# Altium PCB Solar tracker pcb.PcbDoc
Units mm, origin at the board's own origin, x right, y up, seen from the top; angles counter-clockwise.
Board outline 139.83 x 89.41 mm, 2 copper layers (Top Layer, Bottom Layer); 53 components, 31 nets, 183 pads, 91 vias.
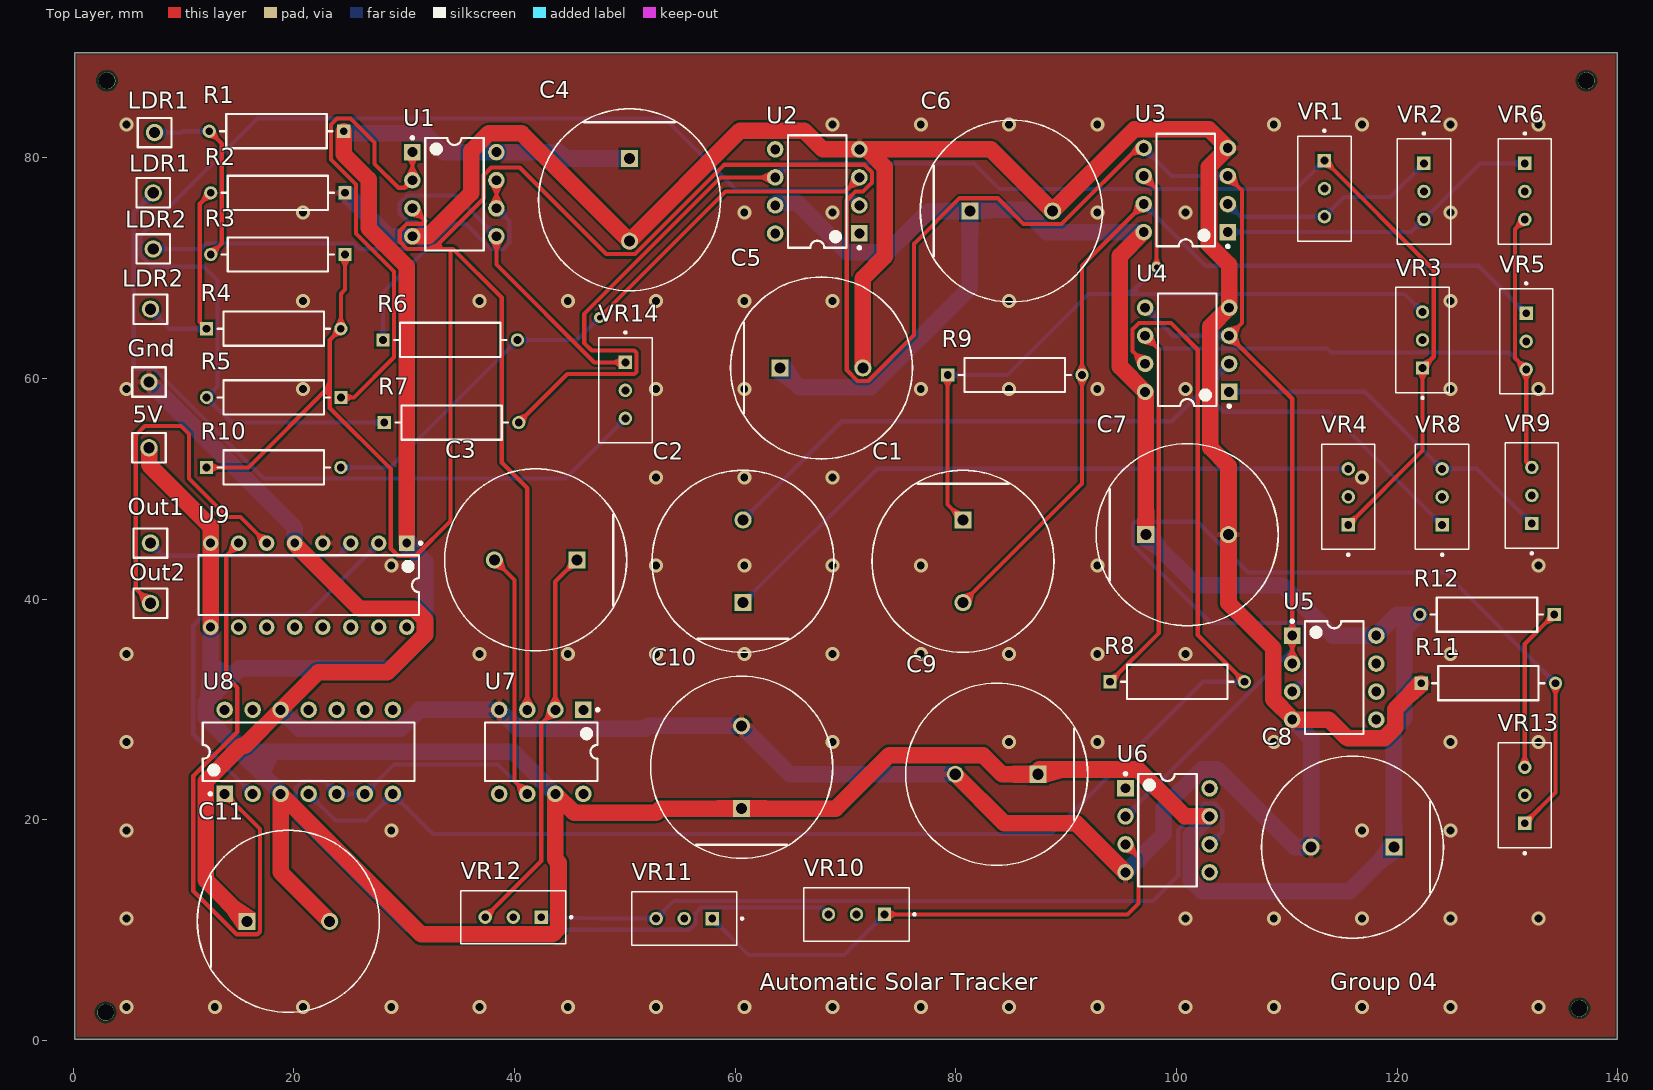
[diagram p0: Top Layer view]
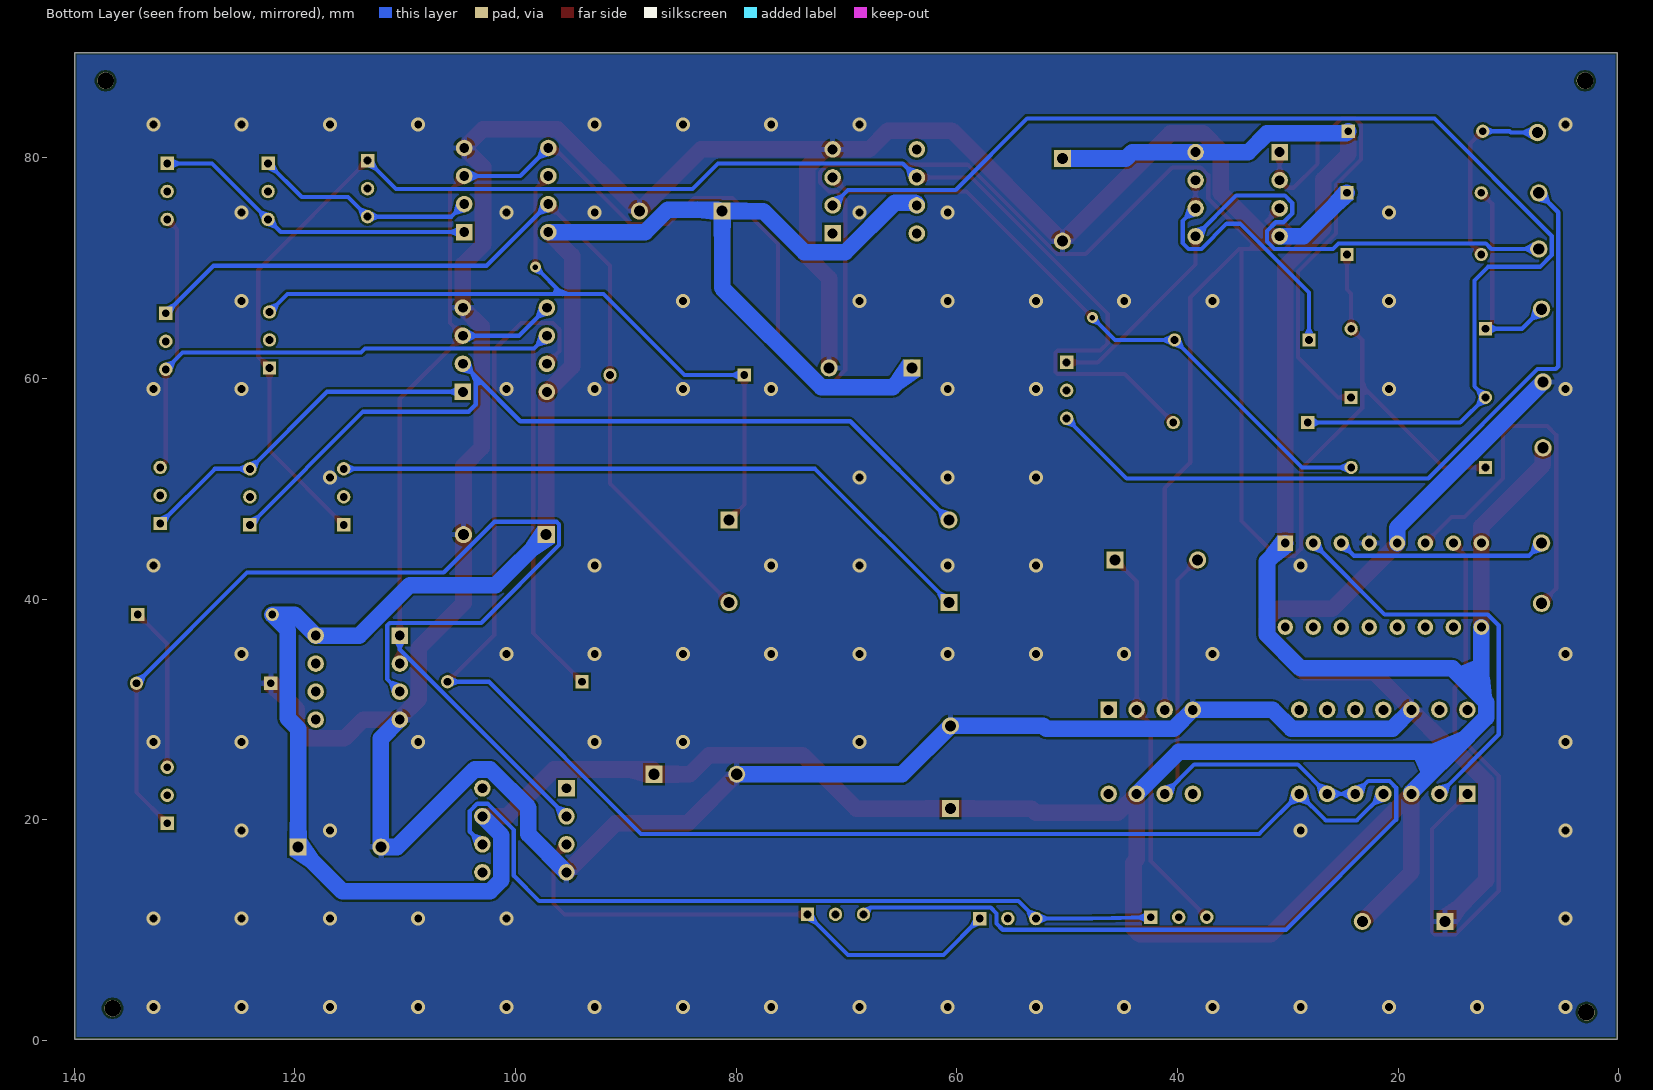
[diagram p1: Bottom Layer view, seen from below]
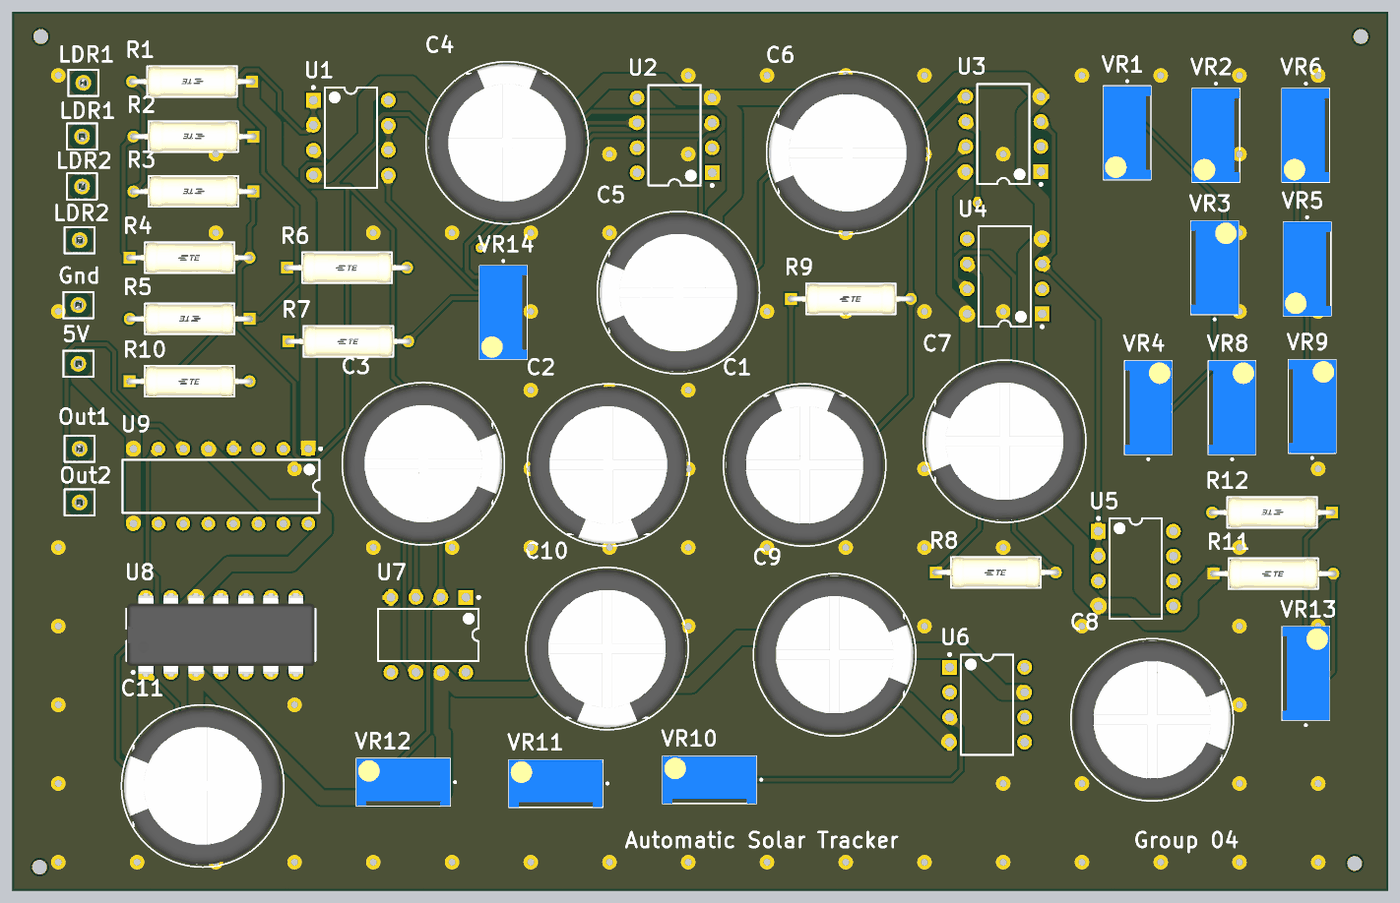
[diagram p2: 3D render of the assembled board from above, using the file's embedded part models]

## Layer stack, top to bottom
Top Solder: solder mask 0.0102, Solder Resist, Dk 3.5
Top Layer: signal copper 0.0356
Dielectric 1: dielectric 0.32, FR-4, Dk 4.8
Bottom Layer: signal copper 0.0356
Bottom Solder: solder mask 0.0102, Solder Resist, Dk 3.5

## Board outline
0.127,0.127 0.127,89.535 139.954,89.535 139.954,0.127

## Design rules (kind name [scope] priority, off if disabled: settings)
BoardOutlineClearance [All] p1: gap=0.2 ignorepadtopadclearanceinfootprint=FALSE except(0.4: Arc-SplitBarrior Arc-SplitContinuation Track-SplitBarrior Track-SplitContinuation SMDPad-SplitBarrior SMDPad-SplitContinuation THPad-SplitBarrior THPad-SplitContinuation Via-SplitBarrior Via-SplitContinuation Fill-SplitBarrior Fill-SplitContinuation Poly-SplitBarrior Poly-SplitContinuation Region-SplitBarrior Region-SplitContinuation Text-SplitBarrior Text-SplitContinuation)
Clearance "Clearance Bottom Layer" [OnLayer('Bottom Layer')] p1: gap=0.203 ignorepadtopadclearanceinfootprint=TRUE except(0.254: Arc-Text Track-Text SMDPad-Text THPad-Text Via-Text Fill-Text Poly-Text Region-Text Text-Text)
Clearance "Clearance Top Layer" [OnLayer('Top Layer')] p2: gap=0.203 ignorepadtopadclearanceinfootprint=TRUE except(0.254: Arc-Text Track-Text SMDPad-Text THPad-Text Via-Text Fill-Text Poly-Text Region-Text Text-Text)
Clearance [All] p3: gap=0.2 ignorepadtopadclearanceinfootprint=FALSE except(0.089: Arc-Arc Arc-Track Arc-SMDPad Track-Track Track-SMDPad SMDPad-SMDPad; 0.127: Arc-Via Track-Via SMDPad-Via THPad-Via Via-Via; 0.254: Arc-Text Track-Text SMDPad-Text THPad-Text Via-Text Fill-Text Poly-Text Region-Text Text-Text)
HoleSize [All] p1: absolutevalues=TRUE maxlimit=6.3 minlimit=0.2 maxpercent=80.000 minpercent=20.000
MinimumAnnularRing [All] p1: minimumring=0.076
MinimumSolderMaskSliver [All] p1: minsoldermaskwidth=0.1
PolygonConnect PolygonConnect_1 [All] p1: thpad.connectstyle=Relief thpad.reliefconductorwidth=0.508 thpad.reliefentries=4 thpad.polygonreliefangle="90 Angle" thpad.airgapwidth=0.254 smdpad.connectstyle=Relief smdpad.reliefconductorwidth=0.508 smdpad.reliefentries=4 smdpad.polygonreliefangle="90 Angle" smdpad.airgapwidth=0.254 via.connectstyle=Direct via.reliefconductorwidth=0.508 via.reliefentries=4 via.polygonreliefangle="90 Angle" via.airgapwidth=0.254
RoutingCorners [All] p1: cornerstyle=Round minsetback=2.54 maxsetback=2.54
RoutingVias [All] p1: holewidth=0.5 width=1 viastyle="Through Hole" minholewidth=0.2 minwidth=0.45 maxholewidth=1 maxwidth=2
SilkToSilkClearance [All] p1: silktosilkclearance=0.1
SilkToSolderMaskClearance [IsPad] p1: minsilkscreentomaskgap=0.1 clearancetoexposedcopper=TRUE
SolderMaskExpansion [All] p1: expansion=0.102 istentingtop=FALSE
Width [All] p1: maxlimit=2.54 minlimit=0.089 preferedwidth=0.381
25 further rules are at their usual default settings.

## Components (designator, comment, footprint, x,y, rotation, side; value= is the part's Value field where it differs from the comment)
5V "PBC01SAAN" FP-PBC01SAAN-MFG 6.858,53.721 r0 top (schematic designator J6)
C1 "EEUEE2G470" FP-RAD-TH-D_16_0_5-L_25_2-MFG 80.645,43.434 r270 top
C2 "EEUEE2G470" FP-RAD-TH-D_16_0_5-L_25_2-MFG 60.706,43.434 r90 top
C3 "EEUEE2G470" FP-RAD-TH-D_16_0_5-L_25_2-MFG 41.91,43.561 r180 top
C4 "EEUEE2G470" FP-RAD-TH-D_16_0_5-L_25_2-MFG 50.419,76.2 r270 top
C5 "EEUEE2G470" FP-RAD-TH-D_16_0_5-L_25_2-MFG 67.818,60.96 r0 top
C6 "EEUEE2G470" FP-RAD-TH-D_16_0_5-L_25_2-MFG 85.023,75.184 r0 top
C7 "EEUEE2G470" FP-RAD-TH-D_16_0_5-L_25_2-MFG 100.965,45.847 r0 top
C8 "EEUEE2G470" FP-RAD-TH-D_16_0_5-L_25_2-MFG 115.951,17.526 r180 top
C9 "EEUEE2G470" FP-RAD-TH-D_16_0_5-L_25_2-MFG 83.693,24.13 r180 top
C10 "EEUEE2G470" FP-RAD-TH-D_16_0_5-L_25_2-MFG 60.579,24.765 r90 top
C11 "EEUEE2G470" FP-RAD-TH-D_16_0_5-L_25_2-MFG 19.491,10.795 r0 top
Gnd "PBC01SAAN" FP-PBC01SAAN-MFG 6.858,59.69 r0 top (schematic designator J5)
LDR1 "PBC01SAAN" FP-PBC01SAAN-MFG 7.239,76.835 r0 top (schematic designator J2)
LDR1 "PBC01SAAN" FP-PBC01SAAN-MFG 7.366,82.296 r0 top (schematic designator J1)
LDR2 "PBC01SAAN" FP-PBC01SAAN-MFG 6.985,66.294 r0 top (schematic designator J4)
LDR2 "PBC01SAAN" FP-PBC01SAAN-MFG 7.239,71.755 r0 top (schematic designator J3)
Out1 "PBC01SAAN" FP-PBC01SAAN-MFG 6.985,45.085 r0 top (schematic designator J7)
Out2 "PBC01SAAN" FP-PBC01SAAN-MFG 6.985,39.624 r0 top (schematic designator J8)
R1 "CFR50J2K2" FP-CFR50J2K2-MFG 18.415,82.423 r180 top
R2 "CFR50J2K2" FP-CFR50J2K2-MFG 18.542,76.835 r180 top
R3 "CFR50J2K2" FP-CFR50J2K2-MFG 18.542,71.247 r180 top
R4 "CFR50J2K2" FP-CFR50J2K2-MFG 18.161,64.516 r0 top
R5 "CFR50J2K2" FP-CFR50J2K2-MFG 18.167,58.293 r180 top
R6 "CFR50J2K2" FP-CFR50J2K2-MFG 34.163,63.5 r0 top
R7 "CFR50J2K2" FP-CFR50J2K2-MFG 34.284,56.007 r0 top
R8 "CFR50J2K2" FP-CFR50J2K2-MFG 100.07,32.512 r0 top
R9 "CFR50J2K2" FP-CFR50J2K2-MFG 85.344,60.325 r0 top
R10 "CFR50J2K2" FP-CFR50J2K2-MFG 18.161,51.943 r0 top
R11 "CFR50J2K2" FP-CFR50J2K2-MFG 128.27,32.385 r0 top
R12 "CFR50J2K2" FP-CFR50J2K2-MFG 128.143,38.608 r180 top
U1 "TL072CP" P0008A 34.544,76.708 r0 top
U2 "UA741CP" P0008A 67.437,76.962 r180 top
U3 "TL072CP" P0008A 100.838,77.089 r180 top
U4 "TL072CP" P0008A 100.965,62.611 r180 top
U5 "TL072CP" P0008A 114.3,32.893 r0 top
U6 "UA741CP" P0008A 99.187,19.05 r0 top
U7 "UA741CP" P0008A 42.418,26.162 r270 top
U8 "LM339N/NOPB" NFF0014A 21.336,26.162 r90 top
U9 "L293D" STM-L293D-16 21.336,41.275 r270 top
VR1 "3296W-1-250" TRIM_3296W-1-250 113.411,77.216 r270 top
VR2 "3296W-1-250" TRIM_3296W-1-250 122.428,76.962 r270 top
VR3 "3296W-1-250" TRIM_3296W-1-250 122.301,63.5 r90 top
VR4 "3296W-1-250" TRIM_3296W-1-250 115.57,49.276 r90 top
VR5 "3296W-1-250" TRIM_3296W-1-250 131.699,63.373 r270 top
VR6 "3296W-1-250" TRIM_3296W-1-250 131.572,76.962 r270 top
VR8 "3296W-1-250" TRIM_3296W-1-250 124.079,49.276 r90 top
VR9 "3296W-1-250" TRIM_3296W-1-250 132.207,49.403 r90 top
VR10 "3296W-1-250" TRIM_3296W-1-250 70.993,11.43 r180 top
VR11 "3296W-1-250" TRIM_3296W-1-250 55.372,11.049 r180 top
VR12 "3296W-1-250" TRIM_3296W-1-250 39.878,11.176 r180 top
VR13 "3296W-1-250" TRIM_3296W-1-250 131.572,22.225 r90 top
VR14 "3296W-1-250" TRIM_3296W-1-250 50.038,58.928 r270 top

## Footprints (in the part's own frame and the unit in brackets; to place one, negate y for a bottom-side part, rotate by r counter-clockwise, add the part's x,y. Pads: shape width x height; smd on the part's side, far side on the other; paste and mask are expansions set on the pad)
FP-CFR50J2K2-MFG [mm]
  rect 1.2x1.2 hole 0.7 paste-1000 mask+0: 1(-6.09,0)
  round 1.2 hole 0.7 paste-1000 mask+0: 2(6.09,0)
  silkscreen extent -5.09,-1.55 5.09,1.55, body extent -6.79,-1.65 6.79,1.65, height 0.25
FP-PBC01SAAN-MFG [mm]
  round 1.57 hole 1.02 paste-1000 mask+0: 1(0,0)
  silkscreen extent -1.53,-1.34 1.53,1.34, body extent -1.63,-1.44 1.63,1.44, height 0.25
FP-RAD-TH-D_16_0_5-L_25_2-MFG [mm]
  rect 1.55x1.55 hole 1 paste-1000 mask+0: 1(-3.75,0)
  round 1.55 hole 1 paste-1000 mask+0: 2(3.75,0)
  silkscreen extent -8.25,-8.25 8.25,8.25, body extent -8.35,-8.35 8.35,8.35, height 0.25
NFF0014A [mm] "DIP, 14-Leads, Body 19.2x6.6mm, Pitch 2.54mm"
  rect 1.5x1.5 hole 0.9: 1(-3.81,7.62)
  round 1.5 hole 0.9: 2(-3.81,5.08) 3(-3.81,2.54) 4(-3.81,0) 5(-3.81,-2.54) 6(-3.81,-5.08) 7(-3.81,-7.62) 8(3.81,-7.62) 9(3.81,-5.08) 10(3.81,-2.54) 11(3.81,0) 12(3.81,2.54) 13(3.81,5.08) 14(3.81,7.62)
  silkscreen extent -3.93,-9.6 2.65,9.6, body extent -4.25,-9.52 4.25,9.53, height 4.08
P0008A [mm] "DIP, 8-Leads, Body 10.15x6.6mm, Pitch 2.54mm"
  rect 1.5x1.5 hole 0.9: 1(-3.81,3.81)
  round 1.5 hole 0.9: 2(-3.81,1.27) 3(-3.81,-1.27) 4(-3.81,-3.81) 5(3.81,-3.81) 6(3.81,-1.27) 7(3.81,1.27) 8(3.81,3.81)
  silkscreen extent -3.93,-5.1 2.65,5.23, body extent -3.95,-5.07 3.95,5.07, height 5.08
STM-L293D-16 [mm] "DIP, 16-Leads, Body 20x6.85mm, Pitch 2.54mm"
  rect 1.4x1.4 hole 0.8: 1(-3.81,8.89)
  round 1.4 hole 0.8: 2(-3.81,6.35) 3(-3.81,3.81) 4(-3.81,1.27) 5(-3.81,-1.27) 6(-3.81,-3.81) 7(-3.81,-6.35) 8(-3.81,-8.89) 9(3.81,-8.89) 10(3.81,-6.35) 11(3.81,-3.81) 12(3.81,-1.27) 13(3.81,1.27) 14(3.81,3.81) 15(3.81,6.35) 16(3.81,8.89)
  silkscreen extent -3.93,-10 2.7,10.27, body extent -3.93,-10 3.93,10, height 5.1
TRIM_3296W-1-250 [mm]
  rect 1.218x1.218 hole 0.71: 1(-2.54,0)
  round 1.218 hole 0.71: 2(0,0) 3(2.54,0)
  silkscreen extent -5.35,-2.41 4.76,2.42, body extent -4.76,-2.42 4.76,2.41, height 11.55

## Part data
5V Gnd LDR1 LDR1 LDR2 LDR2 Out1 Out2: library part CMP-25680-000032-1, "CONN HEADER VERT 1POS", Color=Black, Package Quantity=1, Connector Type="Male Pin", Contact Material=Bronze, Contact Mating Length=0.23inch, Contact Plating=Gold, Gender=Male, Height=2.54mm, Housing Color=Black, Housing Material=Plastic, Lead Free="Lead Free", Length=2.54mm, Mount="Through Hole", Number of Contacts=1, Number of Positions=1, Number of Rows=1, Packaging=Bulk, Pitch=2.54mm, Termination=Solder, Width=2.54mm
C1 C2 C3 C4 C5 C6 C7 C8 C9 C10 C11: library part CMP-05427-001116-1, "Aluminum Electrolytic Capacitors (Radial Lead Type) 47uF ±20% 400V", Capacitance=47uF, Case/Package=Radial, Dielectric Material=Aluminium, Leakage Current=1.138mA, Max Operating Temperature=105°C, Min Operating Temperature=-25°C, Package Quantity=100, Ripple Current=1.18A, Tolerance=20%, Voltage=400V, Construction=RADIAL, Diameter=16mm, Dissipation Factor=0.24%, Height=25mm, Height - Seated (Max)=0.984inch, Lead Diameter=0.8mm, Lead Free="Lead Free", Lead Pitch=7.5mm, Length=25mm, Life (Hours)=10000Hour, Mount="Through Hole", Number of Pins=2, Packaging=Bulk, Radiation Hardening=No, REACH SVHC="No SVHC", Ripple Current (AC)=1.18A, RoHS Compliant=Yes, Series=EE, Termination=Radial, Voltage Rating=400V, Voltage Rating (DC)=400V
R1 R2 R3 R4 R5 R6 R7 R8 R9 R10 R11 R12: library part CMP-03212-000011-1, "RES 2.2K OHM 5% 1/2W AXIAL", Case/Package=Axial, Max Operating Temperature=155°C, Max Power Dissipation=500mW, Min Operating Temperature=-55°C, Number of Resistors=1, Package Quantity=3000, Resistance=2.2kR, Resistance Tolerance=5%, Resistor Type="Thin Film", Temperature Coefficient=0ppm/°C, Voltage Rating=350V, Diameter=3mm, ELV=Compliant, Length=9mm, Mount=Axial, Number of Terminations=2, Packaging="Cut Tape", Power Rating=500mW, Radiation Hardening=No, REACH SVHC="No SVHC", RoHS Compliant=Yes, Series="CFR50, Neohm", Technology="CARBON FILM", Termination=Axial, Tolerance=5%, Voltage Rating (DC)=350V
U1 U3 U4 U5: library part CMP-0017-00950-2, "Dual Low-Noise JFET-Input General-Purpose Operational Amplifier, 7 to 36 V, 0 to 70 degC, 8-pin DIP (P8), Pb-Free (RoHS)", Manufacturer="Texas Instruments", Rating=Catalog, Total Supply Voltage(Max)(+5V is 5, +/-5V is 10)=36, Total Supply Voltage(Min)(+5V is 5, +/-5V is 10)=7, CMRR(Min)(dB)=70, Code_JEDEC=MS-001, ComponentLink1Description="Manufacturer URL", ComponentLink1URL=http://www.ti.com/, ComponentLink2Description=Datasheet, ComponentLink2URL=http://www.ti.com/lit/ds/symlink/tl072.pdf, ComponentLink3Description="Package Specification", ComponentLink3URL=http://www.ti.com/litv/pdf/mpdi001b, DatasheetVersion=SLOS080J, Eco-Plan="Pb-Free (RoHS)", GBW(Typ)(MHz)=3, IIB(Max)(pA)=200, Iq per channel(Max)(mA)=2.5, Mounting Technology="Through Hole", Number of Channels=2, Offset Drift(Typ)(uV/C)=18, PackageDescription="8-Pin Plastic In-Line, Body 9.59 x 6.35 mm, Pitch 2.54 mm", PackageReference=P0008A, PackageVersion="4040082/E, 04/2010", PartNumber=TL072CP, Slew Rate(Typ)(V/us)=13, Sub Family="General Purpose Amplifier, High Supply Voltage Amplifier (>=30V)", Vio (25C)(Max)(mV)=10, Vn at 1kHz(Typ)(nV/rtHz)=18
U2 U6 U7: library part CMP-0017-00973-2, "General-Purpose Operational Amplifier, 7 to 36 V, 0 to 70 degC, 8-pin DIP (P8), Pb-Free (RoHS)", Manufacturer="Texas Instruments", Total Supply Voltage(Max)(+5V is 5, +/-5V is 10)=36, Total Supply Voltage(Min)(+5V is 5, +/-5V is 10)=7, CMRR(Min)(dB)=70, Code_JEDEC=MS-001, ComponentLink1Description="Manufacturer URL", ComponentLink1URL=http://www.ti.com/, ComponentLink2Description=Datasheet, ComponentLink2URL=http://www.ti.com/lit/ds/symlink/ua741.pdf, ComponentLink3Description="Package Specification", ComponentLink3URL=http://www.ti.com/litv/pdf/mpdi001b, DatasheetVersion=SLOS094B, Eco-Plan="Pb-Free (RoHS)", GBW(Typ)(MHz)=1, IIB(Max)(pA)=800000, Iq per channel(Max)(mA)=2.8, Mounting Technology="Through Hole", Number of Channels=1, PackageDescription="8-Pin Plastic In-Line, Body 9.59 x 6.35 mm, Pitch 2.54 mm", PackageReference=P0008A, PackageVersion="4040082/E, 04/2010", PartNumber=UA741CP, Slew Rate(Typ)(V/us)=0.5, Sub Family="General Purpose Amplifier, High Supply Voltage Amplifier (>=30V)", Vio (25C)(Max)(mV)=6
U8: library part CMP-0055-00142-3, "Low Power Low Offset Voltage Quad Comparator, 14-pin MDIP, Pb-Free", Manufacturer="Texas Instruments", Package Reference=NFF0014A, PackageTopMarking=NSUZXYYTTE#*LM339N, PowerWise=N, Code_JEDEC=MS-001-AA, ComponentLink1Description="Datasheet URL", ComponentLink1URL=http://www.ti.com/general/docs/lit/getliterature.tsp?genericPartNumber=LM339-N&fileType=pdf, CompType=Amplifiers, PackageDescription="MDIP, .750 x .250 x.130in, 14 Lead, .100in Pitch", PinCount=14, RoHS=Y
U9: library part CMP-2000-06524-1, "Push-Pull Four Channel Driver with Diode, 4.5 to 36 V, -40 to 150 degC, 16-Pin PDIP, RoHS, Tube", Current - Output / Channel=600mA, Current - Peak Output=1.2A, Manufacturer=STMicroelectronics, On-State Resistance=-, Operating Temperature=-40°C~150°C, Package / Case="16-DIP(0.300\",7.62mm)", Package Description="16-Pin Thru-Hole Dual-In-Line, Body 20 x 6.85 mm, Pitch 2.54 mm", Package Reference=DIP-16, Standard Package=25, Supplier Device Package=16-PowerDIP, Voltage - Supply=4.5V~36V, Category=IntegratedCircuits(ICs), Datasheet URL=http://www.st.com/st-web-ui/static/active/en/resource/technical/document/datasheet/CD00000059.pdf, Datasheet Version=07/2003, Dynamic Catalog=HalfBridge, Family=PMIC-MOSFET,BridgeDrivers-InternalSwitch, Input Type=Non-Inverting, Manufacturer URL=http://www.st.com/, Mounting Technology=ThroughHole, Mounting Type=ThroughHole, Number of Outputs=4, Other Names=497-2936-5, Other Related Documents=L293DViewAllSpecifications, Packaging=Tube, PartNumber=L293D, Series=-, Type=HalfBridge
VR1 VR2 VR3 VR4 VR5 VR6 VR8 VR9 VR10 VR11 VR12 VR13 VR14: "25 Ohms 0.5W, 1/2W PC Pins Through Hole Trimmer Potentiometer Cermet 25.0 Turn Top Adjustment", Package="SOT-23-5 Bourns", Availability="In Stock", Check_prices=https://www.snapeda.com/parts/3296W-1-250/Bourns/view-part/?ref=eda, MF=Bourns, MP=3296W-1-250, Price=None, SnapEDA_Link=https://www.snapeda.com/parts/3296W-1-250/Bourns/view-part/?ref=snap

## Free pads (board coordinates)
  round 1.524 hole 1.5: 6(3.048,86.995) 7(2.921,2.54) 8(136.525,2.921) 9(137.16,86.995)

## Via types
v1: diameter 1.27, hole 0.711, Top Layer to Bottom Layer, 89 vias
v2: diameter 1, hole 0.5, Top Layer to Bottom Layer, 2 vias

## Nets (pads, with @x,y where several pads share a name; then routed paths per layer and width w, separated by ;. In a path a pad name is that pad's centre, name@x,y a point inside that pad or via, vN(x,y) a via of type N, cw(c..) or ccw(c..) an arc to the next point about the centre after c; other vN are vias at no path point)
2.5V: R3.1 R4.2 R10.1 U1.3 U3.3 U3.5 U4.3 U4.5 U5.1 U5.2 U6.2 U7.3 | length 331.8
  Top Layer w0.381: R10.1 15.875,51.943 23.241,59.309 ; R3.1 24.632,68.072 24.251,67.691 R4.2 23.241,63.506 23.241,59.309 ; U1.3 31.902,74.27 31.675,74.042 30.26,74.042 29.59,73.372 29.59,72.424 30.26,71.754 32.622,71.754 ; U7.3 41.148,50.063 38.837,52.375 38.837,67.335 34.418,71.754 34.19,71.754 ; U3.5 97.028,81.458 89.585,74.015 86.129,74.015 83.791,76.353 80.335,76.353 76.194,72.211 76.194,63.933 72.052,59.791 71.084,59.791 70.103,60.772 70.103,76.166 70.9,76.962 71.594,76.962 72.391,77.758 72.391,78.706 71.721,79.376 58.997,79.376 50.903,71.281 48.312,71.281 40.471,79.122 37.88,79.122 37.21,78.452 37.21,76.343 32.622,71.754 ; U3.3 105.943,77.064 105.943,65.049 U4.3 110.49,58.166 U5.1 U5.2 ; 23.241,59.309 23.241,57.328 28.78,51.789 28.78,44.575 29.413,43.941 31.039,43.941 34.19,47.092 34.19,71.754 ; 32.622,71.754 34.19,71.754
  Bottom Layer w0.381: U6.2 110.49,35.433 U5.1 ; U3.5 99.568,78.359 U3.3 ; U4.5 99.695,63.881 U4.3
5V: 5V.1 C4.1 C5.1 C6.1 C7.1 C8.1 C9.1 C10.1 C11.2 R1.1 R12.2 U1.8 U2.7 U3.8 U4.8 U5.8 U6.7 U7.7 U8.3 U9.1 U9.8 U9.9 | length 466.4
  Top Layer w1.5: 5V.1 6.871,53.708 6.871,52.174 12.446,46.6 U9.8 U9.9 ; C11.2 18.796,15.24 U8.3 31.534,9.614 43.422,9.614 43.98,10.172 43.98,16.116 43.688,16.408 U7.7 45.391,20.649 52.855,20.649 53.221,21.015 C10.1 69.11,21.015 73.953,25.858 82.458,25.858 84.187,24.13 C9.1@87.122,24.13 ; R1.1 24.505,80.336 26.769,78.072 26.769,73.628 30.226,70.171 U9.1 ; C9.1 C9.1@87.122,24.13 ; U3.8 94.868,71.119 94.868,61.088 U4.8 97.215,58.741 C7.1 ; U6.7 100.765,20.32 96.522,24.563 87.555,24.563 C9.1@87.122,24.13
  Bottom Layer w1.5: U9.9 12.446,31.111 12.013,30.677 ; U8.3 18.796,22.483 12.013,29.267 ; R1.1 24.511,82.423 24.713,82.221 31.879,82.221 33.582,80.518 U1.8 44.103,80.518 44.67,79.95 C4.1 ; U9.1 31.879,43.432 31.879,36.78 28.828,33.729 15.064,33.729 12.013,30.677 ; U7.7 39.877,26.163 15.117,26.163 12.013,29.267 ; U2.7 63.627,75.818 63.754,75.945 65.606,75.945 70.102,71.449 73.807,71.449 77.543,75.184 C6.1 ; C5.1 65.796,59.232 72.284,59.232 81.273,68.221 C6.1 ; U3.8 88.234,73.279 86.202,75.311 81.661,75.311 81.534,75.184 C6.1 ; C7.1 101.799,41.263 109.605,41.263 114.164,36.703 U5.8 120.015,38.608 R12.2 120.627,37.182 120.627,29.191 119.701,28.265 C8.1 115.712,13.537 102.292,13.537 101.294,14.535 101.294,18.617 U6.7 ; 12.013,29.267 12.013,30.677 ; 12.013,29.267 12.013,30.677
GND: C4.2 C5.2 C6.2 C7.2 C8.2 C9.2 C10.2 C11.1 Gnd.1 R2.1 R11.1 U1.4 U2.4 U3.4 U4.4 U5.4 U6.4 U7.4 U8.12 U9.4 U9.5 | length 393.5
  Top Layer w1.5: C11.1 12.013,14.523 12.013,23.497 15.25,26.734 15.558,26.734 U8.12 22.2,33.376 28.475,33.376 31.879,36.78 31.879,38.15 30.911,39.118 25.957,39.118 20.066,45.009 U9.5 ; U1.4 32.148,72.898 36.067,76.816 36.067,80.639 37.649,82.221 40.648,82.221 C4.2 60.444,82.475 66.233,82.475 67.936,80.772 U2.4 83.185,80.772 C6.2 96.191,82.602 102.945,82.602 U3.4 102.945,79.196 102.945,72.134 104.775,70.304 U4.4 103.072,64.718 103.072,53.725 104.715,52.082 C7.2 104.715,39.63 108.787,35.558 108.787,30.918 110.49,29.214 U5.4 113.801,29.083 115.504,27.38 118.815,27.38 119.813,28.378 119.813,30.018 R11.1 ; C5.2 71.568,69.093 73.534,71.06 73.534,79.179 72.194,80.519 ; C9.2 84.393,19.68 90.937,19.68 U6.4
  Bottom Layer w1.5: Gnd.1 6.872,59.69 20.066,46.496 U9.5 ; U8.12 20.499,28.269 29.661,28.269 31.365,29.972 U7.4 40.311,28.269 51.903,28.269 52.149,28.515 C10.2 64.964,24.13 C9.2 ; R2.1 28.569,72.898 U1.4 ; U6.4 98.834,18.697 98.834,21.106 102.292,24.563 103.702,24.563 110.73,17.536 112.191,17.536 C8.2 112.201,27.372 U5.4
  other v1: 4.822,3.043 12.822,3.043 20.822,3.043 28.822,3.043 36.822,3.043 44.822,3.043 52.822,3.043 60.822,3.043 68.822,3.043 76.822,3.043 84.822,3.043 92.822,3.043 100.822,3.043 108.822,3.043 116.822,3.043 124.822,3.043 132.822,3.043 4.822,11.043 100.822,11.043 108.822,11.043 116.822,11.043 124.822,11.043 132.822,11.043 4.822,19.043 28.822,19.043 116.822,19.043 124.822,19.043 4.822,27.043 68.822,27.043 84.822,27.043 92.822,27.043 108.822,27.043 124.822,27.043 132.822,27.043 4.822,35.043 36.822,35.043 44.822,35.043 52.822,35.043 60.822,35.043 68.822,35.043 76.822,35.043 84.822,35.043 92.822,35.043 100.822,35.043 124.822,35.043 28.822,43.043 52.822,43.043 60.822,43.043 68.822,43.043 76.822,43.043 92.822,43.043 132.822,43.043 52.822,51.043 60.822,51.043 68.822,51.043 116.822,51.043 4.822,59.043 20.822,59.043 52.822,59.043 60.822,59.043 76.822,59.043 84.822,59.043 92.822,59.043 100.822,59.043 124.822,59.043 132.822,59.043 20.822,67.043 36.822,67.043 44.822,67.043 52.822,67.043 60.822,67.043 68.822,67.043 84.822,67.043 124.822,67.043 20.822,75.043 60.822,75.043 68.822,75.043 92.822,75.043 100.822,75.043 124.822,75.043 4.822,83.043 68.822,83.043 76.822,83.043 84.822,83.043 92.822,83.043 108.822,83.043 116.822,83.043 124.822,83.043 132.822,83.043
NetC1_1: C1.1 R9.1 U3.6 VR3.3 | length 72.7
  Top Layer w0.381: R9.1 79.254,48.575 C1.1 ; U3.6 98.196,77.191 v2(98.196,70.104)
  Bottom Layer w0.381: R9.1 84.684,60.325 92.024,67.666 95.758,67.666 ; v2(98.196,70.104) 95.758,67.666 ; VR3.3 120.675,67.666 95.758,67.666
NetC1_2: C1.2 R9.2 U3.7 VR5.1 | length 81.7
  Top Layer w0.381: C1.2 91.434,50.473 R9.2 91.434,70.225 U3.7
  Bottom Layer w0.381: U3.7 102.616,70.231 127.381,70.231 VR5.1
NetC2_1: C2.1 VR4.3 | length 59.9
  Bottom Layer w0.381: C2.1 72.838,51.816 VR4.3
NetC2_2: C2.2 U4.2 VR8.1 | length 77.5
  Bottom Layer w0.381: C2.2 69.656,56.134 99.568,56.134 103.607,60.173 ; U4.2 103.607,60.173 ; VR8.1 113.817,56.998 104.242,56.998 103.607,57.633 103.607,60.173
NetC3_1: C3.1 U7.2 VR12.3 | length 35.8
  Top Layer w0.381: VR12.3 42.418,16.256 42.418,28.702 U7.2 43.688,41.589 C3.1
NetC3_2: C3.2 U7.6 U8.5 U8.6 VR10.3 | length 103.3
  Top Layer w0.381: C3.2 39.98,41.741 39.98,23.52 U7.6
  Bottom Layer w0.381: U7.6 38.481,25.019 29.083,25.019 U8.6 U8.5 22.708,23.52 20.777,23.52 20.168,22.911 20.168,20.015 30.15,10.033 55.829,10.033 56.388,10.592 56.388,11.518 56.921,12.052 67.831,12.052 VR10.3
NetJ1_1: LDR1.1@7.366,82.296 R1.2 R3.2 | length 17.1
  Top Layer w0.381: R1.2 13.462,81.286 13.462,72.257 R3.2
  Bottom Layer w0.381: LDR1.1@7.366,82.296 9.779,82.296 9.906,82.423 R1.2
NetJ2_1: LDR1.1@7.239,76.835 VR14.3 | length 67.5
  Bottom Layer w0.381: LDR1.1@7.239,76.835 5.476,75.072 5.476,61.092 5.699,60.869 7.346,60.869 17.266,50.949 44.599,50.949 VR14.3
NetJ3_1: LDR2.1@7.239,71.755 U1.5 VR14.1 | length 58.6
  Top Layer w0.381: U1.5 38.354,70.333 47.219,61.468 VR14.1
  Bottom Layer w0.381: LDR2.1@7.239,71.755 11.555,71.755 12.04,72.241 25.395,72.241 25.881,71.754 31.208,71.754 31.878,72.424 31.878,73.372 31.081,74.168 30.387,74.168 29.59,74.964 29.59,75.912 30.26,76.582 34.67,76.582 U1.5
NetJ4_1: LDR2.1@6.985,66.294 R2.2 R4.1 | length 18.8
  Top Layer w0.381: R4.1 11.455,65.132 11.455,75.838 R2.2
  Bottom Layer w0.381: LDR2.1@6.985,66.294 8.763,64.516 R4.1
NetJ7_1: Out1.1 U9.3 | length 19.1
  Bottom Layer w0.381: Out1.1 8.129,43.941 24.002,43.941 U9.3
NetJ8_1: Out2.1 U9.6 | length 34.8
  Top Layer w0.381: Out2.1 5.664,40.945 5.664,54.889 6.477,55.702 9.754,55.702 10.493,54.963 10.493,50.938 13.984,47.447 15.164,47.447 U9.6
NetR5_1: R5.1 U1.1 U1.2 | length 43.9
  Top Layer w0.381: R5.1 25.429,58.293 29.067,61.931 29.067,69.713 25.626,73.154 25.626,77.598 23.361,79.862 23.361,83.036 23.892,83.567 25.118,83.567 27.291,81.394 27.291,79.465 29.463,77.292 30.048,77.292 U1.2 U1.1
NetR5_2: R5.2 R7.1 U2.2 | length 110.6
  Bottom Layer w0.381: R7.1 14.363,56.007 R5.2 13.081,59.297 13.081,68.885 11.836,70.129 7.137,70.129 6.06,71.207 6.06,72.923 16.704,83.567 53.619,83.567 60.097,77.088 69.851,77.088 U2.2
NetR6_1: R6.1 U1.6 U1.7 | length 25.7
  Top Layer w0.381: U1.6 U1.7
  Bottom Layer w0.381: R6.1 28.073,67.793 34.321,74.042 35.534,74.042 37.821,71.754 38.988,71.754 39.522,72.288 39.522,74.27 U1.6
NetR6_2: R6.2 R10.2 U2.3 | length 57.9
  Top Layer w0.381: v2(47.701,65.532) 59.131,76.962 69.977,76.962 U2.3
  Bottom Layer w0.381: R10.2 28.696,51.943 R6.2 45.669,63.5 v2(47.701,65.532)
NetR7_2: R7.2 U2.6 VR1.1 VR3.1 VR4.1 | length 137.2
  Top Layer w0.381: R7.2 44.768,60.401 50.851,60.401 51.054,60.604 51.054,62.332 50.851,62.535 46.995,62.535 46.304,63.226 46.304,65.856 58.68,78.232 U2.6 ; VR1.1 123.317,69.85 123.317,61.976 VR3.1 122.301,53.467 VR4.1
  Bottom Layer w0.381: U2.6 64.897,79.502 81.636,79.502 83.947,77.191 110.846,77.191 VR1.1
NetR8_1: R8.1 U4.6 VR5.3 VR6.3 VR9.3 | length 93
  Top Layer w0.381: R8.1 98.4,36.932 98.4,62.636 U4.6 ; VR6.3 130.683,73.533 130.683,61.849 VR5.3 131.699,52.451 VR9.3
  Bottom Layer w0.381: U4.6 98.323,62.713 113.64,62.713 113.995,62.357 130.175,62.357 VR5.3
NetR8_2: R8.2 U4.7 U8.4 U8.7 | length 136.7
  Top Layer w0.381: U4.7 96.011,62.485 96.011,64.464 96.596,65.049 99.492,65.049 101.928,62.613 101.928,36.744 R8.2
  Bottom Layer w0.381: U8.4 23.749,19.939 26.543,19.939 U8.7 32.588,18.72 88.621,18.72 102.413,32.512 R8.2
NetR11_2: R11.2 U5.3 VR13.1 | length 85.3
  Top Layer w0.381: VR13.1 134.36,22.473 R11.2
  Bottom Layer w0.381: U5.3 111.634,32.767 111.634,37.616 111.403,37.847 103.109,37.847 96.046,44.909 96.046,46.785 96.277,47.016 101.894,47.016 106.503,42.406 124.339,42.406 R11.2
NetR12_1: R12.1 VR13.3 | length 14.9
  Top Layer w0.381: VR13.3 131.572,35.947 R12.1
NetU3_1: U3.1 VR2.3 VR6.1 | length 29.5
  Bottom Layer w0.381: U3.1 121.285,73.279 VR2.3 127.508,79.502 VR6.1
NetU3_2: U3.2 VR1.3 VR2.1 | length 20.3
  Bottom Layer w0.381: U3.2 105.791,74.676 VR1.3 115.189,76.454 119.38,76.454 VR2.1
NetU4_1: U4.1 VR8.3 VR9.1 | length 32.4
  Bottom Layer w0.381: U4.1 117.094,58.801 VR8.3 127.254,51.816 VR9.1
NetU6_3: U6.3 VR10.1 VR11.1 | length 47.8
  Top Layer w0.381: VR10.1 95.555,11.43 96.545,12.421 96.545,16.612 U6.3
  Bottom Layer w0.381: VR11.1 61.214,7.747 69.85,7.747 VR10.1
NetU6_6: U6.6 VR11.3 VR12.1 | length 72.2
  Bottom Layer w0.381: VR12.1 47.752,11.049 VR11.3 54.419,12.636 97.853,12.636 100.15,14.933 100.15,19.091 102.523,21.464 103.471,21.464 104.141,20.794 104.141,18.924 U6.6
NetU8_1: U8.1 U9.7 | length 56.9
  Top Layer w0.381: U8.1 13.716,22.675 13.48,22.912 13.48,22.588 16.91,19.158 16.91,9.857 16.679,9.626 14.803,9.626 10.869,13.56 10.869,23.971 14.86,27.961 14.86,31.978 13.868,32.969 13.868,43.967 U9.7
NetU8_2: U8.2 U9.2 | length 37.4
  Bottom Layer w0.381: U8.2 10.869,27.739 10.869,37.615 11.863,38.609 21.21,38.609 U9.2
pads on no net: U2.1 U2.5 U2.8 U5.5 U5.6 U5.7 U6.1 U6.5 U6.8 U7.1 U7.5 U7.8 U8.8 U8.9 U8.10 U8.11 U8.13 U8.14 U9.10 U9.11 U9.12 U9.13 U9.14 U9.15 U9.16 VR1.2 VR2.2 VR3.2 VR4.2 VR5.2 VR6.2 VR8.2 VR9.2 VR10.2 VR11.2 VR12.2 VR13.2 VR14.2

## Polygon pours and split planes (outlines as drawn)
GND on Bottom Layer "GND_L02_P000" (solid, pour order 0): 140.716,89.916 140.081,89.281 140.081,-0.508 -0.254,-0.508 -0.254,89.662
GND on Top Layer "GND_L01_P001" (solid, pour order 1): 140.335,90.043 140.335,-0.127 140.208,-0.254 -0.254,-0.254 -0.177,-0.177 -0.508,0.154 -0.508,90.17

## Silkscreen, mask and mechanical layers (free items; w line width, h text height)
Top Overlay:
  text "Automatic Solar Tracker" at 62.23,4.572 h1.52
  text "Group 04" at 113.919,4.572 h1.52
Mechanical 1:
  the board outline again, w0.254